# Altium PCB IOT_CPU_v0.PcbDoc (part 2 of 2)
Units mil, origin at the board's own origin, x right, y up, seen from the top; angles counter-clockwise.
Board outline 3866.14 x 1661.42 mil, 4 copper layers (Top Layer, Top, Bottom Layer, Bottom, Mid-Layer 2, GND, Mid-Layer 1, +3.3V); 132 components, 138 nets, 669 pads, 214 vias.
Unrouted connection lines stored in the file: 63.
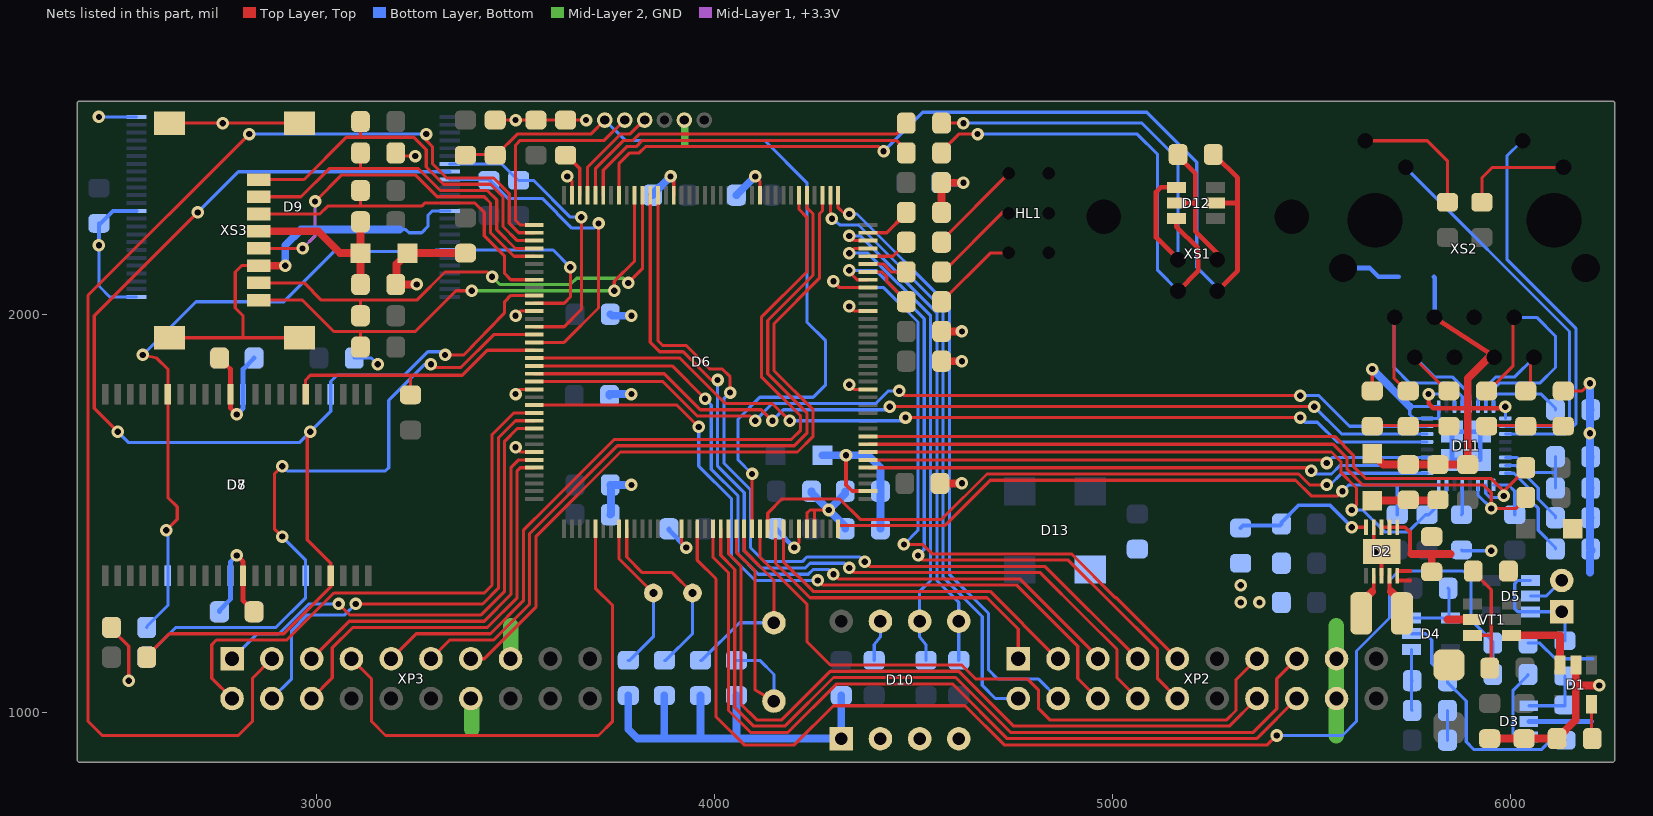
[diagram p4: the nets of this part, all layers, seen from the top]

## Via types
v1: diameter 31.5, hole 15.75, Top Layer, Top to Bottom Layer, Bottom, 214 vias

## Nets (pads, with @x,y where several pads share a name; then routed paths per layer and width w, separated by ;. In a path a pad name is that pad's centre, name@x,y a point inside that pad or via, vN(x,y) a via of type N, cw(c..) or ccw(c..) an arc to the next point about the centre after c; other vN are vias at no path point) (continued)
ETH-CRSDV: D6.43 D11.15 R31.1 | length 1669.2
  Top Layer, Top w7.87: D6.43@4385.83,1653.54 5551.18,1653.54 5574.8,1629.92 5574.8,1602.36 5614.17,1562.99 5614.17,1519.68 v1(5602.36,1507.87)
  Bottom Layer, Bottom w7.87: v1(5602.36,1507.87) 5629.92,1507.87 5685.04,1452.76 5744.09,1452.76 5787.4,1496.06 R31.1@5791.34,1496.06 5795.28,1496.06 5840.55,1541.34 D11.15@5840.55,1570.87
ETH-MDC: D6.27 D11.17 | length 1803.7
  Top Layer, Top w7.87: D6.27@4133.86,1460.63 4133.86,1500 4169.29,1535.43 4314.96,1535.43 4366.14,1484.25 4570.87,1484.25 4685.04,1598.43 5468.5,1598.43 5496.06,1570.87 v1(5539.37,1570.87)
  Bottom Layer, Bottom w7.87: v1(5539.37,1570.87) 5547.24,1570.87 5576.77,1600.39 D11.17@5791.34,1600.39
ETH-MDIO: D6.36 D11.16 R25.1 | length 1667.5
  Top Layer, Top w7.87: D6.36@4311.02,1460.63 4311.02,1468.5 4578.74,1468.5 4692.91,1582.68 5460.63,1582.68 5500,1543.31 5566.93,1543.31 v1(5578.74,1555.12)
  Bottom Layer, Bottom w7.87: v1(5578.74,1555.12) 5594.49,1570.87 5716.54,1570.87 ; R25.1@5716.54,1496.06 5716.54,1570.87 ; D11.16@5820.87,1570.87 5716.54,1570.87
ETH-RX0: D6.44 D11.11 R27.1 | length 1846.2
  Top Layer, Top w7.87: D6.44@4385.83,1673.23 5555.12,1673.23 5590.55,1637.8 5590.55,1610.24 5629.92,1570.87 5933.07,1570.87 5952.76,1551.18 v1(5952.76,1511.81) 6015.75,1511.81 6039.37,1535.43 R27.1@6039.37,1539.37
  Bottom Layer, Bottom w7.87: D11.11@5919.29,1570.87 5919.29,1545.28 v1(5952.76,1511.81)
ETH-RX1: D6.45 D11.10 R29.1 | length 1838
  Top Layer, Top w7.87: D6.45@4385.83,1692.91 5559.06,1692.91 5606.3,1645.67 5606.3,1618.11 5637.8,1586.61 5952.76,1586.61 v1@5984.25,1555.12 ; v1(5984.25,1543.31) v1@5984.25,1555.12 ; R29.1@6039.37,1614.17 6039.37,1610.24 v1@5984.25,1555.12
  Bottom Layer, Bottom w7.87: D11.10@5938.98,1570.87 5938.98,1549.21 5948.82,1539.37 5980.31,1539.37 v1(5984.25,1543.31)
ETH-TX0: D6.128 D11.22 | length 2336.2
  Top Layer, Top w7.87: D6.128@3547.24,1850.39 3874.02,1850.39 3964.57,1759.84 4118.11,1759.84 v1(4145.67,1732.28) ; v1(4440.94,1767.72) v1(5507.87,1767.72)
  Bottom Layer, Bottom w7.87: v1(4145.67,1732.28) 4173.23,1759.84 4433.07,1759.84 v1(4440.94,1767.72) ; v1(5507.87,1767.72) 5576.77,1698.82 D11.22@5791.34,1698.82
ETH-TX1: D6.129 D11.23 | length 2352.5
  Top Layer, Top w7.87: D6.129@3547.24,1830.71 3870.08,1830.71 3956.69,1744.09 4090.55,1744.09 v1(4102.36,1732.28) ; v1(4464.57,1807.09) 4476.38,1795.28 v1(5472.44,1795.28)
  Bottom Layer, Bottom w7.87: v1(4102.36,1732.28) 4145.67,1775.59 4405.51,1775.59 4437.01,1807.09 v1(4464.57,1807.09) ; v1(5472.44,1795.28) 5519.69,1795.28 5596.46,1718.5 D11.23@5791.34,1718.5
ETH-TXEN: D6.126 D11.21 | length 2337.9
  Top Layer, Top w7.87: D6.126@3547.24,1889.76 3913.39,1889.76 4027.56,1775.59 4145.67,1775.59 v1(4188.98,1732.28) ; v1(4480.31,1740.16) v1(5472.44,1740.16)
  Bottom Layer, Bottom w7.87: v1(4188.98,1732.28) 4472.44,1732.28 v1(4480.31,1740.16) ; v1(5472.44,1740.16) 5484.25,1728.35 5515.75,1728.35 5564.96,1679.13 D11.21@5791.34,1679.13
ETH_RST: D6.42 D11.19 | length 1414.5
  Top Layer, Top w7.87: D6.42@4385.83,1633.86 5531.5,1633.86 v1(5539.37,1625.98)
  Bottom Layer, Bottom w7.87: v1(5539.37,1625.98) 5553.15,1639.76 D11.19@5791.34,1639.76
ETH_~INT: D6.41 D11.18 | length 1421
  Top Layer, Top w7.87: D6.41@4385.83,1614.17 5492.13,1614.17 v1(5500,1606.3)
  Bottom Layer, Bottom w7.87: v1(5500,1606.3) 5507.87,1598.43 5551.18,1598.43 5572.83,1620.08 D11.18@5791.34,1620.08
GND: C1.1 C2.1 C3.1 C4.1 C5.2 C6.1 C7.1 C8.1 C9.2 C10.1 C11.1 C12.2 C13.2 C14.1 C15.1 C16.2 C17.2 C18.2 C19.2 C20.2 C21.1 C22.1 C23.1 C24.1 C25.1 C26.1 C27.2 C28.1 C29.2 C30.1 C31.2 C32.1 C33.1 C34.1 C35.1 C36.1 C37.1 C38.2 C39.1 C40.2 C41.2 C43.2 C44.2 C45.2 C47.2 C48.2 C49.1 C50.2 C52.1 C53.1 D1.2 D2.3 D2.9 D2.11 D3.2 D4.2 D5.2 D6.16 D6.31 D6.38 D6.51 D6.61 D6.83 D6.94 D6.107 D6.120 D6.130 D6.138 D7.12 D7.34 D8.12 D8.34 D9.13 D9.25 D9.36 D9.48 D10.1 D10.2 D10.3 D10.4 D10.7 D11.24 D11.25 D11.33 D11.34 D11.35 D11.36 D12.2 D13.2 HL1.2 HL1.4 HL1.6 R1.1 R2.1 R5.1 R8.1 R10.1 R28.2 R30.2 R32.2 R39.2 R44.2 R55.1 R56.1 X5.1 XP1.2 XP2.17 XP2.18 XP3.14 XP3.15 XS1.4 XS2.15 XS2.16 XS3.6 XS3.9 XS3.10 XS3.11 XS3.12 | length 10524.4
  Top Layer, Top w7.87: R55.1@2484.25,1212.6 2484.25,1208.66 2527.56,1165.35 v1(2527.56,1078.74) ; XS3.12@2629.92,1940.94 2814.96,1940.94 ; XS3.11@2629.92,2480.32 v1(2763.78,2480.32) XS3.10@2956.69,2480.32 ; XS3.6@2854.33,2122.05 2811.02,2122.05 2795.28,2106.3 2795.28,2015.75 2814.96,1996.06 2814.96,1940.94 ; XS3.9@2956.69,1940.94 2814.96,1940.94 ; R44.2@3198.82,2405.51 3206.69,2397.64 v1(3248.03,2397.64) ; C8.1@3448.82,2488.19 v1(3500,2488.19) C28.1@3551.18,2488.19 C21.1@3625.98,2488.19 v1(3677.17,2488.19) ; v1(3500,1665.35) 3511.81,1653.54 D6.138@3547.24,1653.54 ; v1(3500,1799.21) 3511.81,1811.02 D6.130@3547.24,1811.02 ; v1(3500,1996.06) 3511.81,2007.87 D6.120@3547.24,2007.87 ; v1(3629.92,2346.46) 3641.73,2334.65 D6.107@3641.73,2299.21 ; v1(3889.76,2346.46) 3897.64,2338.58 D6.94@3897.64,2299.21 ; D6.16@3917.32,1460.63 3917.32,1425.2 v1(3929.13,1413.39) ; v1(4102.36,2346.46) 4114.17,2334.65 D6.83@4114.17,2299.21 ; v1(4200.79,1413.39) 4212.6,1425.2 D6.31@4212.6,1460.63 ; v1(4338.58,1822.83) 4350.39,1811.02 D6.51@4385.83,1811.02 ; v1(4338.58,2019.68) 4350.39,2007.87 D6.61@4385.83,2007.87 ; C53.1@5653.54,1807.09 v1(5653.54,1862.2) ; C52.1@6133.86,1807.09 6181.1,1807.09 v1(6200.79,1826.77)
  Top Layer, Top w9.84: v1(4330.71,1645.67) 4330.71,1570.87 4346.46,1555.12 D6.38@4385.83,1555.12 ; D2.9@5657.48,1464.57 5657.48,1405.51 v1(5661.42,1401.57) ; D2.3@5677.17,1342.52 5677.17,1385.83 5668.31,1394.68 v1(5661.42,1401.57) ; D2.11@5677.17,1403.54 5663.39,1403.54 v1(5661.42,1401.57)
  Top Layer, Top w11.81: C33.1@2755.91,1889.76 2783.46,1862.2 D7.12@2783.46,1799.21 2783.46,1763.78 v1(2799.21,1748.03) ; v1(2799.21,1393.7) 2814.96,1377.95 2814.96,1279.53 C32.1@2842.52,1251.97 ; D12.2@5161.42,2279.53 5208.66,2279.53 ; C39.1@5165.35,2401.57 5165.35,2397.64 5208.66,2354.33 5208.66,2279.53 ; XS1.4@5263.78,2137.01 5263.78,2153.54 5208.66,2208.66 5208.66,2279.53
  Top Layer, Top w19.68: XS3.6@2854.33,2122.05 v1(2921.26,2122.05) ; v1(3251.97,2074.8) C47.2@3198.82,2074.8 3200.79,2076.77 3200.79,2125.98 C48.2@3228.35,2153.54 C36.1@3374.02,2153.54 ; C22.1@4566.93,1574.8 v1(4622.05,1574.8) ; C23.1@4570.87,1881.89 v1(4622.05,1881.89) ; C24.1@4570.87,1956.69 v1(4622.05,1956.69) ; C14.1@4570.87,2255.91 C25.1@4570.87,2330.71 v1(4625.98,2330.71) ; C40.2@5649.61,1535.43 C40.2@5653.54,1531.5 5742.13,1531.5 C41.2@5744.09,1533.46 5746.06,1531.5 5816.93,1531.5 C43.2@5818.9,1533.46 ; R1.1@5948.82,933.07 C1.1@6035.43,933.07 R2.1@6118.11,933.07 6165.35,980.32 6165.35,1066.93 ; D1.2@6165.35,1118.11 6165.35,1066.93 ; v1(6224.41,1066.93) 6165.35,1066.93
  Mid-Layer 2, GND w19.68: X5.1@3924.41,2488.19 3925.2,2487.4 3925.2,2429.13
  Mid-Layer 2, GND w39.37: XP3.14@3387.4,1033.86 3389.76,1031.5 3389.76,956.69 ; XP3.15@3487.4,1133.86 3488.19,1134.65 3488.19,1216.54 ; 5562.99,940.94 XP2.18@5562.99,1034.65 ; 5562.99,1216.54 5562.99,1134.65 XP2.17@5563.78,1133.86 5562.99,1133.07 XP2.18@5562.99,1034.65 ; XP2.18@5563.78,1033.86 XP2.18@5562.99,1034.65
  Bottom Layer, Bottom w7.87: v1(2452.76,2173.23) 2452.76,2070.87 2480.32,2043.31 D9.25@2547.24,2043.31 ; v1(2452.76,2496.06) D9.48@2547.24,2496.06 ; R56.1@3094.49,1889.76 3137.8,1889.76 v1(3153.54,1874.02) ; 3208.66,2212.6 3224.41,2212.6 3232.28,2204.72 3263.78,2204.72 3279.53,2220.47 3279.53,2248.03 3291.34,2259.84 D9.13@3334.65,2259.84 ; C6.1@4401.57,1129.92 4401.57,1169.29 4417.32,1188.98 D10.7@4417.32,1228.35 ; D4.2@5751.97,1196.85 5787.4,1196.85 5803.15,1181.1 5803.15,1122.05 5842.52,1082.68 R8.1@5842.52,1078.74 5842.52,1074.8 5889.76,1027.56 5889.76,925.2 5909.45,905.51 6078.74,905.51 6102.36,929.13 R5.1@6137.8,929.13 ; D11.33@5854.33,1704.72 5820.87,1738.19 ; R32.2@5877.95,1407.48 5879.92,1405.51 v1(5952.76,1405.51) ; C5.2@6045.28,1173.23 6074.8,1173.23 6114.17,1133.86 6208.66,1133.86 ; D5.2@6051.18,1291.34 6090.55,1291.34 XP1.2@6129.92,1330.71 ; 5820.87,1738.19 5757.87,1738.19 5748.03,1748.03 5748.03,1767.72 D11.25@5820.87,1767.72 5820.87,1738.19
  Bottom Layer, Bottom w9.84: v1(2452.76,2173.23) C37.1@2452.76,2228.35 2456.69,2228.35 2488.19,2259.84 D9.36@2547.24,2259.84
  Bottom Layer, Bottom w11.81: C35.1@2755.91,1251.97 2755.91,1255.91 2783.46,1283.46 D8.12@2783.46,1342.52 2783.46,1377.95 v1(2799.21,1393.7) ; v1(2799.21,1748.03) 2814.96,1763.78 2814.96,1862.2 C34.1@2842.52,1889.76 ; C15.1@3885.83,1460.63 3885.83,1456.69 v1(3929.13,1413.39) ; C16.2@4155.51,1460.63 4157.48,1458.66 4157.48,1456.69 v1(4200.79,1413.39) ; XS2.15@5580.24,2116.22 5647.56,2116.22 5669.29,2094.49 5720.47,2094.49 ; D3.2@6047.24,976.38 6204.72,976.38 ; D11.34@5854.33,1633.86 D11.33@5854.33,1704.72 D11.35@5925.2,1704.72 D11.36@5925.2,1633.86 D11.34@5854.33,1633.86
  Bottom Layer, Bottom w19.68: v1(2921.26,2122.05) 2921.26,2173.23 2960.63,2212.6 3208.66,2212.6 ; C30.1@3736.22,1795.28 3736.22,1799.21 v1(3791.34,1799.21) ; C12.2@3738.19,1496.06 3740.16,1498.03 3740.16,1568.9 C31.2@3738.19,1570.87 v1(3791.34,1570.87) ; C29.2@3738.19,2000 3744.09,1996.06 v1(3791.34,1996.06) ; C17.2@3783.46,1041.34 3783.46,956.69 3807.09,933.07 3874.02,933.07 ; C27.2@3844.49,2299.21 3844.49,2301.18 v1(3889.76,2346.46) ; C18.2@3874.02,1041.34 3874.02,933.07 ; C20.2@3964.57,1041.34 3964.57,933.07 ; C19.2@4055.12,1041.34 4055.12,933.07 ; C26.1@4055.12,2299.21 v1(4102.36,2346.46) ; C9.2@4271.65,1645.67 v1(4330.71,1645.67) 4385.83,1645.67 4417.32,1614.17 C10.1@4417.32,1555.12 C11.1@4417.32,1460.63 ; C38.2@4318.9,1041.34 D10.1@4318.9,933.07 4055.12,933.07 ; C13.2@4568.9,2330.71 v1(4625.98,2330.71) ; v1(5653.54,1862.2) 5748.03,1767.72 ; 6200.79,1350.39 6200.79,1401.57 6204.72,1405.51 6204.72,1407.48 R28.2@6202.76,1409.45 6200.79,1411.42 6200.79,1486.22 R30.2@6202.76,1488.19 6200.79,1490.16 6200.79,1561.02 C44.2@6202.76,1562.99 6200.79,1564.96 6200.79,1635.83 C45.2@6202.76,1641.73 6200.79,1637.8 v1(6200.79,1700.79) 6200.79,1757.87 R39.2@6202.76,1759.84 6200.79,1761.81 v1(6200.79,1826.77) ; 3874.02,933.07 3964.57,933.07 ; 3964.57,933.07 4055.12,933.07
  other v1: 5322.83,1275.59 5370.08,1275.59 5322.83,1318.9
NCE3: D6.124 D9.9 R19.2 | length 839
  Top Layer, Top w7.87: D6.124@3547.24,1929.13 3622.05,1929.13 3708.66,2015.75 v1(3708.66,2228.35)
  Bottom Layer, Bottom w7.87: D9.9@3334.65,2338.58 3429.13,2338.58 R19.2@3433.07,2336.61 3435.04,2336.61 3480.32,2291.34 3566.93,2291.34 3641.73,2216.54 3696.85,2216.54 v1(3708.66,2228.35)
NE1: D6.123 D8.6 R16.2 | length 1720.2
  Top Layer, Top w7.87: v1(2913.39,1440.94) 2893.7,1460.63 2893.7,1598.43 v1(2913.39,1618.11) ; v1(3287.4,1874.02) 3295.28,1866.14 3362.2,1866.14 3444.88,1948.82 D6.123@3547.24,1948.82
  Bottom Layer, Bottom w7.87: R16.2@2572.83,1137.8 2574.8,1141.73 2645.67,1212.6 2897.64,1212.6 2972.44,1287.4 2972.44,1381.89 v1(2913.39,1440.94) ; v1(2913.39,1618.11) 2925.2,1606.3 3173.23,1606.3 3181.1,1614.17 3181.1,1783.46 3271.65,1874.02 v1(3287.4,1874.02)
NE3: D6.125 D7.6 R21.2 | length 690.4
  Top Layer, Top w7.87: D7.6@2972.44,1799.21 2972.44,1834.65 2984.25,1846.46 3236.22,1846.46 ; R21.2@3236.22,1797.24 3236.22,1846.46 ; D6.125@3547.24,1909.45 3429.13,1909.45 3366.14,1846.46 3236.22,1846.46
NET00000: C2.2 R3.1 VT1.3 | length 311.7
  Top Layer, Top w7.87: VT1.3@5905.51,1192.91 5952.76,1192.91 ; C2.2@5907.48,1354.33 5909.45,1352.36 5909.45,1350.39 5952.76,1307.09 5952.76,1192.91 ; R3.1@5948.82,1110.24 5948.82,1114.17 5952.76,1118.11 5952.76,1192.91
NET00001: C3.2 D2.5 D2.6 D2.7 D2.8 VD1.K VT1.2 | length 424.2
  Top Layer, Top w9.84: D2.8@5677.17,1464.57 D2.7@5696.85,1464.57 D2.6@5716.54,1464.57 5736.22,1464.57 5748.03,1452.76 5748.03,1397.64 ; 5748.03,1330.71 5716.54,1330.71 5716.54,1354.33 5748.03,1354.33
  Top Layer, Top w19.68: 5751.97,1397.64 5803.15,1397.64 ; C3.2@5803.15,1352.36 5803.15,1397.64 ; 5842.52,1232.28 VT1.2@5905.51,1232.28 ; 5850.39,1397.64 5803.15,1397.64
NET00002: D1.3 D5.1 D5.3 R4.2 VT1.4 XP1.1 | length 499.9
  Top Layer, Top w19.68: VT1.4@6003.94,1192.91 6125.98,1192.91 D1.3@6125.98,1118.11
  Bottom Layer, Bottom w7.87: D5.1@6051.18,1330.71 6019.69,1330.71 6011.81,1322.83 6011.81,1259.84 6019.69,1251.97 D5.3@6051.18,1251.97 XP1.1@6129.92,1251.97 6137.8,1244.09 R4.2@6137.8,1179.13
NET00003: D3.1 R4.1 R5.2 | length 165.4
  Bottom Layer, Bottom w7.87: D3.1@6047.24,1015.75 6137.8,1015.75 R4.1@6137.8,1090.55
NET00004: D3.3 D3.4 R11.2 | length 271
  Bottom Layer, Bottom w7.87: D3.4@5948.82,937.01 6007.87,937.01 ; R11.2@6045.28,1094.49 6043.31,1090.55 6007.87,1055.12 6007.87,937.01 ; D3.3@6047.24,937.01 6007.87,937.01
NET00005: HL1.1 R51.1 | length 243.4
  Top Layer, Top w7.87: R51.1@4570.87,2181.1 4570.87,2185.04 HL1.1@4740.16,2354.33
NET00006: D1.5 R2.2 | length 87.1
  Top Layer, Top w7.87: D1.5@6204.72,1019.68 6204.72,937.01 R2.2@6206.69,933.07
NET00007: HL1.3 R52.1 | length 231.6
  Top Layer, Top w7.87: R52.1@4570.87,2106.3 4574.8,2106.3 4724.41,2255.91 4736.22,2255.91 HL1.3@4740.16,2254.33
NET00008: HL1.5 R53.1 | length 220.6
  Top Layer, Top w7.87: R53.1@4570.87,2031.5 4692.91,2153.54 4740.16,2153.54 HL1.5@4740.16,2154.33
NET00009: D2.4 L1.1 | length 111.5
  Top Layer, Top w9.84: D2.4@5696.85,1342.52 5696.85,1307.09 5700.79,1303.15
  Top Layer, Top w19.68: 5700.79,1303.15 5728.35,1275.59 L1.1@5728.35,1248.03 L1.1@5728.35,1244.09
NET00010: D2.2 L1.2 | length 107.5
  Top Layer, Top w9.84: 5653.54,1303.15 5657.48,1307.09 D2.2@5657.48,1342.52
  Top Layer, Top w19.68: L1.2@5625.98,1248.03 5625.98,1275.59 5653.54,1303.15
NET00012: D6.68 R51.2 | length 111.9
  Top Layer, Top w7.87: D6.68@4385.83,2145.67 4448.82,2145.67 4480.31,2177.17 R51.2@4482.28,2181.1
NET00013: D2.10 R9.1 R10.2 | length 363.7
  Top Layer, Top w9.84: v1(5602.36,1464.57) D2.10@5637.8,1464.57
  Bottom Layer, Bottom w9.84: R10.2@5322.83,1462.6 5328.74,1468.5 5421.26,1468.5 R9.1@5425.2,1472.44 5425.2,1476.38 5468.5,1519.68 5547.24,1519.68 v1(5602.36,1464.57)
NET00014: BQ1.2 C17.1 D6.8 | length 395
  Top Layer, Top w7.87: D6.8@3759.84,1460.63 3759.84,1385.83 BQ1.2@3846.46,1299.21
  Bottom Layer, Bottom w7.87: C17.1@3783.46,1129.92 3787.4,1129.92 3846.46,1188.98 BQ1.2@3846.46,1299.21
NET00015: BQ1.1 C18.1 D6.9 | length 474.7
  Top Layer, Top w7.87: D6.9@3779.53,1460.63 3779.53,1389.76 3818.9,1350.39 3893.7,1350.39 BQ1.1@3944.88,1299.21
  Bottom Layer, Bottom w7.87: C18.1@3874.02,1129.92 3877.95,1129.92 3944.88,1196.85 BQ1.1@3944.88,1299.21
NET00016: BQ2.2 C19.1 D6.23 | length 655.9
  Top Layer, Top w7.87: D6.23@4055.12,1460.63 4055.12,1401.57 4102.36,1354.33 4102.36,1055.12 BQ2.2@4149.61,1027.56
  Bottom Layer, Bottom w7.87: C19.1@4055.12,1129.92 4114.17,1129.92 4149.61,1094.49 BQ2.2@4149.61,1027.56
NET00017: BQ2.1 C20.1 D6.24 | length 491.4
  Top Layer, Top w7.87: D6.24@4074.8,1460.63 4074.8,1405.51 4149.61,1330.71 BQ2.1@4149.61,1224.41
  Bottom Layer, Bottom w7.87: C20.1@3964.57,1129.92 3968.5,1129.92 4062.99,1224.41 BQ2.1@4149.61,1224.41
NET00018: C44.1 C45.1 D11.6 | length 220.2
  Bottom Layer, Bottom w7.87: D11.6@5988.19,1639.76 6017.72,1639.76 6055.12,1602.36 6114.17,1602.36 ; C44.1@6114.17,1562.99 6114.17,1602.36 ; C45.1@6114.17,1641.73 6114.17,1602.36
NET00019: C21.2 D6.106 | length 115.9
  Top Layer, Top w9.84: C21.2@3625.98,2399.61 3629.92,2397.64 3661.42,2366.14 D6.106@3661.42,2299.21
NET00020: C14.2 D6.71 | length 118.5
  Top Layer, Top w9.84: D6.71@4385.83,2204.72 4433.07,2204.72 4480.31,2251.97 C14.2@4482.28,2255.91
NET00021: D6.67 R52.2 | length 104.6
  Top Layer, Top w7.87: D6.67@4385.83,2125.98 4425.2,2125.98 4444.88,2106.3 R52.2@4482.28,2106.3
NET00023: C10.2 C11.2 D6.32 D6.33 R14.1 | length 338.9
  Top Layer, Top w7.87: D6.32@4232.28,1460.63 4232.28,1500 4240.16,1507.87 4251.97,1507.87 ; D6.33@4251.97,1460.63 4251.97,1507.87 ; v1(4287.4,1507.87) 4251.97,1507.87
  Bottom Layer, Bottom w19.68: R14.1@4244.09,1555.12 4244.09,1551.18 v1(4287.4,1507.87) ; C11.2@4328.74,1460.63 4328.74,1466.54 v1(4287.4,1507.87) ; C10.2@4328.74,1555.12 4328.74,1549.21 v1(4287.4,1507.87)
NET00024: D6.66 R53.2 | length 135.2
  Top Layer, Top w7.87: D6.66@4385.83,2106.3 4421.26,2106.3 4433.07,2094.49 4433.07,2082.68 4480.31,2035.43 R53.2@4482.28,2031.5
NET00028: 
NET00029: R6.1 R7.1 | length 74.8
  Bottom Layer, Bottom w7.87: R6.1@5842.52,929.13 R7.1@5842.52,1003.94
NET00030: C40.1 C41.1 C43.1 D11.1 D11.27 L3.1 XS2.3 XS2.6 | length 1184.7
  Top Layer, Top w11.81: v1(5795.28,1799.21) 5795.28,1775.59 5807.09,1763.78 5893.7,1763.78 5984.25,1763.78 v1(5988.19,1767.72) ; XS2.3@5810.24,1992.13 5960.63,1893.7
  Top Layer, Top w19.68: C40.1@5653.54,1649.61 5681.1,1622.05 C41.1@5744.09,1622.05 C43.1@5818.9,1622.05 L3.1@5893.7,1622.05 5893.7,1763.78 5893.7,1838.58 5947.24,1892.13 XS2.6@5960.24,1892.13 5960.24,1893.31 5960.63,1893.7
  Bottom Layer, Bottom w7.87: v1(5795.28,1799.21) 5850.39,1799.21 5860.24,1789.37 D11.27@5860.24,1767.72 ; D11.1@5988.19,1738.19 v1(5988.19,1767.72)
  Bottom Layer, Bottom w11.81: 5809.06,2094.49 5811.02,2090.55 5811.02,1992.91 XS2.3@5810.24,1992.13
NET00031: D4.1 R7.2 R8.2 | length 156
  Bottom Layer, Bottom w7.87: D4.1@5751.97,1157.48 5751.97,1080.71 R8.2@5753.94,1078.74 5751.97,1076.77 5751.97,1005.91 R7.2@5753.94,1003.94
NET00032: D4.3 D4.4 R12.2 | length 174
  Bottom Layer, Bottom w7.87: D4.3@5751.97,1236.22 D4.4@5846.46,1236.22 ; R12.2@5844.49,1311.02 5846.46,1309.06 D4.4@5846.46,1236.22 ; D4.4@5850.39,1236.22 D4.4@5846.46,1236.22
NET00038: C52.2 R35.2 R36.2 | length 196.2
  Top Layer, Top w7.87: R36.2@5940.94,1718.5 5942.91,1720.47 6037.4,1720.47 R35.2@6039.37,1718.5 6041.34,1720.47 6131.89,1720.47 C52.2@6133.86,1718.5
NET00039: C53.2 R37.2 R38.2 | length 196.2
  Top Layer, Top w7.87: C53.2@5653.54,1718.5 5655.51,1720.47 5742.13,1720.47 R37.2@5744.09,1718.5 5746.06,1720.47 5844.49,1720.47 R38.2@5846.46,1718.5
NET00041: D11.13 R32.1 | length 75.6
  Bottom Layer, Bottom w7.87: R32.1@5877.95,1496.06 5879.92,1498.03 D11.13@5879.92,1570.87
NET00042: D11.7 R30.1 | length 199.1
  Bottom Layer, Bottom w7.87: D11.7@5988.19,1620.08 6013.78,1620.08 6070.87,1562.99 6070.87,1535.43 6114.17,1492.13 R30.1@6114.17,1488.19
NET00043: D11.8 R28.1 | length 255.8
  Bottom Layer, Bottom w7.87: D11.8@5988.19,1600.39 6009.84,1600.39 6055.12,1555.12 6055.12,1527.56 6070.87,1511.81 6070.87,1456.69 6114.17,1413.39 R28.1@6114.17,1409.45
NET00049: D11.9 R26.1 | length 118.7
  Bottom Layer, Bottom w7.87: D11.9@5958.66,1570.87 5996.06,1570.87 6011.81,1555.12 R26.1@6011.81,1496.06
NET00053: D11.2 XS2.10 | length 974.5
  Bottom Layer, Bottom w7.87: XS2.10@5738.19,2369.29 5740.16,2367.32 5740.16,2366.14 6149.61,1956.69 6149.61,1732.28 6135.83,1718.5 D11.2@5988.19,1718.5
NET00054: D11.3 XS2.11 | length 988.5
  Bottom Layer, Bottom w7.87: D11.3@5988.19,1698.82 6139.76,1698.82 6165.35,1724.41 6165.35,1964.57 5992.13,2137.8 5992.13,2397.64 6027.56,2433.07 XS2.11@6032.28,2436.22
NET00056: R48.2 XS2.12 | length 277.2
  Top Layer, Top w7.87: R48.2@5929.13,2281.5 5929.13,2342.52 5955.83,2369.22 XS2.12@6134.24,2369.22
NET00058: D11.32 R39.1 | length 199.9
  Bottom Layer, Bottom w7.87: D11.32@5958.66,1767.72 5958.66,1789.37 5968.5,1799.21 6078.74,1799.21 6114.17,1763.78 R39.1@6114.17,1759.84
NET00061: C47.1 C48.1 L2.1 XS3.4 | length 436.2
  Top Layer, Top w19.68: XS3.4@2854.33,2208.66 3003.94,2208.66 3059.06,2153.54 C48.1@3110.24,2153.54 ; C47.1@3110.24,2074.8 C48.1@3110.24,2153.54 ; L2.1@3110.24,2232.28 C48.1@3110.24,2153.54
NET00070: D12.3 R33.1 XS1.2 | length 1176.8
  Top Layer, Top w7.87: R33.1@4570.87,2405.51 4570.87,2409.45 4614.17,2452.76 v1(4661.42,2452.76)
  Top Layer, Top w11.81: D12.3@5161.42,2240.16 5161.42,2220.47 5216.54,2165.35 5216.54,2109.45 XS1.2@5165.35,2058.27
  Bottom Layer, Bottom w7.87: v1(4661.42,2452.76) 5062.99,2452.76 5114.17,2401.57 5114.17,2110.24 5165.35,2059.06 XS1.2@5165.35,2058.27
NET00071: D12.1 R34.1 XS1.3 | length 1133.7
  Top Layer, Top w7.87: R34.1@4570.87,2480.32 v1(4625.98,2480.32)
  Top Layer, Top w11.81: D12.1@5161.42,2318.9 5122.05,2318.9 5110.24,2307.09 5110.24,2192.91 5165.35,2137.8 XS1.3@5165.35,2137.01
  Bottom Layer, Bottom w7.87: v1(4625.98,2480.32) 5074.8,2480.32 5165.35,2389.76 XS1.3@5165.35,2137.01
NET00088: R47.2 XS2.9 | length 331.5
  Top Layer, Top w7.87: XS2.9@5636.24,2436.22 5792.13,2436.22 5842.52,2385.83 R47.2@5842.52,2281.5
PC0: D6.26 XP2.13 | length 1681.9
  Top Layer, Top w7.87: D6.26@4114.17,1460.63 4114.17,1389.76 4232.28,1271.65 4232.28,1177.17 4291.34,1118.11 4622.05,1118.11 4657.48,1082.68 4787.4,1082.68 4814.96,1055.12 4814.96,1007.87 4842.52,980.32 5287.4,980.32 5311.02,1003.94 5311.02,1081.1 XP2.13@5363.78,1133.86
PE11: D6.64 XP2.9 | length 1728.3
  Top Layer, Top w7.87: v1(4299.21,2082.68) 4314.96,2066.93 D6.64@4385.83,2066.93 ; v1(4476.38,1421.26) 4523.62,1421.26 4547.24,1397.64 4897.64,1397.64 5007.87,1287.4 5010.24,1287.4 XP2.9@5163.78,1133.86
  Bottom Layer, Bottom w7.87: v1(4299.21,2082.68) 4314.96,2066.93 4425.2,2066.93 4511.81,1980.32 4511.81,1456.69 v1(4476.38,1421.26)
PE12: D6.65 XP2.10 | length 1744.3
  Top Layer, Top w7.87: v1(4338.58,2110.24) 4338.58,2106.3 4358.27,2086.61 D6.65@4385.83,2086.61 ; v1(4511.81,1393.7) 4523.62,1381.89 4889.76,1381.89 5000,1271.65 5114.17,1157.48 5114.17,1083.46 XP2.10@5163.78,1033.86
  Bottom Layer, Bottom w7.87: v1(4338.58,2110.24) 4405.51,2110.24 4527.56,1988.19 4527.56,1409.45 v1(4511.81,1393.7)
PF10: D6.22 XP2.14 | length 1903.5
  Top Layer, Top w7.87: D6.22@4035.43,1460.63 4035.43,1397.64 4066.93,1366.14 4066.93,1019.68 4106.3,980.32 4169.29,980.32 4291.34,1102.36 4614.17,1102.36 4751.97,964.57 5294.49,964.57 XP2.14@5363.78,1033.86
RD+: D11.31 R36.1 XS2.7 | length 649.2
  Top Layer, Top w7.87: R36.1@5940.94,1807.09 5944.88,1807.09 6007.87,1870.08 6007.87,1989.76 XS2.7@6010.24,1992.13
  Bottom Layer, Bottom w7.87: D11.31@5938.98,1767.72 5938.98,1793.31 5972.44,1826.77 6074.8,1826.77 6114.17,1866.14 6114.17,1944.88 6066.93,1992.13 XS2.7@6010.24,1992.13
RD-: D11.30 R35.1 XS2.8 | length 304.1
  Top Layer, Top w7.87: R35.1@6039.37,1807.09 6051.18,1818.9 6051.18,1883.07 XS2.8@6060.24,1892.13
  Bottom Layer, Bottom w7.87: D11.30@5919.29,1767.72 5919.29,1797.24 5964.57,1842.52 6011.81,1842.52 6059.06,1889.76 6059.06,1890.94 XS2.8@6060.24,1892.13
SCL1: D6.139 XP3.5 | length 953.8
  Top Layer, Top w7.87: XP3.5@2987.4,1133.86 3081.89,1228.35 3421.26,1228.35 3488.19,1295.28 3488.19,1614.17 3507.87,1633.86 D6.139@3547.24,1633.86
SCL2: D6.69 D10.6 R24.1 | length 1205.2
  Top Layer, Top w7.87: v1(4338.58,2153.54) 4350.39,2165.35 D6.69@4385.83,2165.35
  Bottom Layer, Bottom w7.87: v1(4338.58,2153.54) 4385.83,2153.54 4543.31,1996.06 4543.31,1330.71 4515.75,1303.15 D10.6@4515.75,1228.35 4515.75,1188.98 4531.5,1169.29 R24.1@4531.5,1129.92
SDA1: D6.140 XP3.6 | length 1031.3
  Top Layer, Top w7.87: XP3.6@2987.4,1033.86 3039.37,1085.83 3039.37,1161.42 3090.55,1212.6 3429.13,1212.6 3503.94,1287.4 3503.94,1606.3 3511.81,1614.17 D6.140@3547.24,1614.17
SDA2: D6.70 D10.5 R23.1 | length 1249.4
  Top Layer, Top w7.87: v1(4338.58,2196.85) 4350.39,2185.04 D6.70@4385.83,2185.04
  Bottom Layer, Bottom w7.87: v1(4338.58,2196.85) 4366.14,2196.85 4559.06,2003.94 4559.06,1330.71 4614.17,1275.59 D10.5@4614.17,1228.35 R23.1@4614.17,1129.92
SDIO_CK: D6.113 XS3.5 | length 948.9
  Top Layer, Top w7.87: XS3.5@2854.33,2165.35 v1(2964.57,2165.35) ; v1(2996.06,2283.46) 3062.99,2350.39 3248.03,2350.39 3303.15,2295.28 3421.26,2295.28 3437.01,2279.53 3437.01,2204.72 3496.06,2145.67 D6.113@3547.24,2145.67
  Mid-Layer 1, +3.3V w7.87: v1(2964.57,2165.35) 2996.06,2196.85 v1(2996.06,2283.46)
SDIO_CMD: D6.116 R40.1 XS3.3 | length 883.6
  Top Layer, Top w7.87: XS3.3@2854.33,2251.97 3007.87,2251.97 3027.56,2271.65 3110.24,2271.65 ; R40.1@3110.24,2311.02 3110.24,2271.65 ; D6.116@3547.24,2086.61 3488.19,2086.61 3472.44,2102.36 3472.44,2145.67 3421.26,2196.85 3421.26,2255.91 3397.64,2279.53 3271.65,2279.53 3263.78,2271.65 3110.24,2271.65
SDIO_D0: D6.98 R41.1 XS3.7 | length 1281
  Top Layer, Top w7.87: XS3.7@2854.33,2078.74 2968.5,2078.74 3011.81,2035.43 3110.24,2035.43 ; R41.1@3110.24,1996.06 3110.24,2035.43 ; v1(3440.94,2094.49) 3429.13,2106.3 3322.83,2106.3 3251.97,2035.43 3110.24,2035.43 ; v1(3783.46,2078.74) 3818.9,2114.17 D6.98@3818.9,2299.21
  Mid-Layer 2, GND w7.87: v1(3440.94,2094.49) 3460.63,2074.8 3637.8,2074.8 3653.54,2090.55 3771.65,2090.55 v1(3783.46,2078.74) 3779.53,2074.8
SDIO_D1: D6.99 R42.1 XS3.8 | length 1269.4
  Top Layer, Top w7.87: XS3.8@2854.33,2035.43 2964.57,2035.43 3043.31,1956.69 3110.24,1956.69 ; R42.1@3110.24,1917.32 3110.24,1956.69 ; v1(3389.76,2059.06) 3350.39,2059.06 3248.03,1956.69 3110.24,1956.69 ; v1(3748.03,2059.06) 3748.03,2082.68 3799.21,2133.86 D6.99@3799.21,2299.21
  Mid-Layer 2, GND w7.87: v1(3389.76,2059.06) v1(3748.03,2059.06)
SDIO_D2: D6.111 R43.1 XS3.1 | length 953.1
  Top Layer, Top w7.87: XS3.1@2854.33,2338.58 2968.5,2338.58 3074.8,2444.88 3110.24,2444.88 ; R43.1@3110.24,2484.25 3110.24,2444.88 ; D6.111@3547.24,2185.04 3503.94,2185.04 3468.5,2220.47 3468.5,2295.28 3437.01,2326.77 3318.9,2326.77 3275.59,2370.08 3275.59,2413.39 3244.09,2444.88 3110.24,2444.88
SDIO_D3: D6.112 R44.1 XS3.2 | length 888.6
  Top Layer, Top w7.87: XS3.2@2854.33,2295.28 2960.63,2295.28 3031.5,2366.14 3110.24,2366.14 ; R44.1@3110.24,2405.51 3110.24,2366.14 ; D6.112@3547.24,2165.35 3500,2165.35 3452.76,2212.6 3452.76,2287.4 3429.13,2311.02 3311.02,2311.02 3255.91,2366.14 3110.24,2366.14
SPI1_CS: D6.110 XP3.3 | length 3162.5
  Top Layer, Top w7.87: v1(2830.71,2452.76) 2425.2,2047.24 2425.2,976.38 2460.63,940.94 2803.15,940.94 2838.58,976.38 2838.58,1085.04 XP3.3@2887.4,1133.86 ; v1(3275.59,2452.76) 3275.59,2437.01 3291.34,2421.26 3291.34,2377.95 3326.77,2342.52 3444.88,2342.52 3484.25,2303.15 3484.25,2228.35 3507.87,2204.72 D6.110@3547.24,2204.72
  Bottom Layer, Bottom w7.87: v1(2830.71,2452.76) v1(3275.59,2452.76)
SPI1_MISO: D6.134 XP3.4 | length 1241.6
  Top Layer, Top w7.87: v1(3098.43,1271.65) 3417.32,1271.65 3456.69,1311.02 3456.69,1688.98 3500,1732.28 D6.134@3547.24,1732.28
  Bottom Layer, Bottom w7.87: XP3.4@2887.4,1033.86 2937.01,1083.46 2937.01,1204.72 2976.38,1244.09 3070.87,1244.09 v1(3098.43,1271.65)
SPI1_MOSI: D6.135 XP3.1 | length 1243.8
  Top Layer, Top w7.87: v1(3055.12,1271.65) 3082.68,1244.09 3413.39,1244.09 3472.44,1303.15 3472.44,1681.1 3503.94,1712.6 D6.135@3547.24,1712.6
  Bottom Layer, Bottom w7.87: XP3.1@2787.4,1133.86 2850.39,1196.85 2905.51,1196.85 2980.32,1271.65 v1(3055.12,1271.65)
SPI1_SCK: D6.133 XP3.2 | length 1430.4
  Top Layer, Top w7.87: XP3.2@2787.4,1033.86 2736.22,1085.04 2736.22,1169.29 2748.03,1181.1 2925.2,1181.1 3043.31,1299.21 3421.26,1299.21 3440.94,1318.9 3440.94,1696.85 3496.06,1751.97 D6.133@3547.24,1751.97
SPI2_CS: D6.73 XP2.4 | length 1572.7
  Top Layer, Top w7.87: D6.73@4311.02,2299.21 4311.02,2267.72 4326.77,2251.97 v1(4338.58,2251.97)
  Bottom Layer, Bottom w7.87: v1(4338.58,2251.97) 4358.27,2251.97 4590.55,2019.68 4590.55,1346.46 4688.98,1248.03 4688.98,1106.3 4712.6,1082.68 4814.96,1082.68 XP2.4@4863.78,1033.86
SPI2_MISO: D6.28 XP2.1 | length 840.1
  Top Layer, Top w7.87: D6.28@4153.54,1460.63 4153.54,1374.02 4240.16,1287.4 4685.04,1287.4 4763.78,1208.66 XP2.1@4763.78,1133.86
SPI2_MOSI: D6.29 XP2.3 | length 874
  Top Layer, Top w7.87: D6.29@4173.23,1460.63 4173.23,1377.95 4248.03,1303.15 4692.91,1303.15 4858.27,1137.8 XP2.3@4863.78,1133.86
SPI2_SCK: D6.74 XP2.2 | length 1523
  Top Layer, Top w7.87: D6.74@4291.34,2299.21 4291.34,2248.03 v1(4295.28,2240.16)
  Bottom Layer, Bottom w7.87: v1(4295.28,2240.16) 4314.96,2224.41 4362.2,2224.41 4574.8,2011.81 4574.8,1338.58 4673.23,1240.16 4673.23,1066.93 4706.3,1033.86 XP2.2@4763.78,1033.86
SWDCK: D6.109 X2.1 | length 541.6
  Top Layer, Top w7.87: D6.109@3547.24,2224.41 3511.81,2224.41 3500,2236.22 3500,2425.2 3511.81,2437.01 3723.23,2437.01 X2.1@3774.41,2488.19
SWDIO: D6.105 X3.1 | length 262.7
  Top Layer, Top w7.87: D6.105@3681.1,2299.21 3681.1,2370.08 3763.78,2452.76 3787.4,2452.76 3818.9,2484.25 X3.1@3824.41,2488.19
TD+: D11.29 R38.1 XS2.2 | length 331.6
  Top Layer, Top w7.87: XS2.2@5760.24,1892.13 5760.24,1890.16 5759.84,1889.76 5842.52,1807.09 R38.1@5846.46,1807.09
  Bottom Layer, Bottom w7.87: XS2.2@5760.24,1892.13 5809.84,1842.52 5854.33,1842.52 5899.61,1797.24 D11.29@5899.61,1767.72
TD-: D11.28 R37.1 XS2.1 | length 556.3
  Top Layer, Top w7.87: XS2.1@5710.24,1992.13 5710.24,1989.76 5708.66,1988.19 5708.66,1838.58 5740.16,1807.09 R37.1@5744.09,1807.09
  Bottom Layer, Bottom w7.87: XS2.1@5710.24,1992.13 5710.24,1985.83 5708.66,1984.25 5708.66,1866.14 5748.03,1826.77 5846.46,1826.77 5879.92,1793.31 D11.28@5879.92,1767.72
UART3_RTS: D6.75 XP3.13 | length 1893.6
  Top Layer, Top w7.87: XP3.13@3387.4,1133.86 3421.26,1133.86 3551.18,1263.78 3551.18,1440.94 3763.78,1653.54 4208.66,1653.54 4248.03,1692.91 4248.03,1759.84 4149.61,1858.27 4149.61,1976.38 4263.78,2090.55 4263.78,2251.97 4271.65,2259.84 D6.75@4271.65,2299.21
UART3_RX: D6.78 XP3.9 | length 2057.8
  Top Layer, Top w7.87: XP3.9@3187.4,1133.86 3250.39,1196.85 3437.01,1196.85 3519.68,1279.53 3519.68,1456.69 3582.68,1519.68 3748.03,1685.04 4192.91,1685.04 4216.54,1708.66 4216.54,1744.09 4118.11,1842.52 4118.11,1992.13 4232.28,2106.3 4232.28,2244.09 4212.6,2263.78 D6.78@4212.6,2299.21
UART3_TX: D6.77 XP3.11 | length 1976.5
  Top Layer, Top w7.87: XP3.11@3287.4,1133.86 3334.65,1181.1 3444.88,1181.1 3535.43,1271.65 3535.43,1448.82 3755.91,1669.29 4200.79,1669.29 4232.28,1700.79 4232.28,1751.97 4133.86,1850.39 4133.86,1984.25 4248.03,2098.43 4248.03,2251.97 4232.28,2267.72 D6.77@4232.28,2299.21
UART6_CTS: D6.132 XP2.6 | length 1912.6
  Top Layer, Top w7.87: D6.132@3547.24,1771.65 3905.51,1771.65 v1(3960.63,1716.54) ; v1(4259.84,1330.71) 4271.65,1318.9 4759.84,1318.9 4913.39,1165.35 4913.39,1084.25 XP2.6@4963.78,1033.86
  Bottom Layer, Bottom w7.87: v1(3960.63,1716.54) 3960.63,1618.11 4043.31,1535.43 4043.31,1389.76 4102.36,1330.71 v1(4259.84,1330.71)
UART6_RTS: D6.127 XP2.5 | length 1913.9
  Top Layer, Top w7.87: D6.127@3547.24,1870.08 3893.7,1870.08 v1(3976.38,1787.4) ; v1(4299.21,1346.46) 4311.02,1334.65 4767.72,1334.65 4963.78,1138.58 XP2.5@4963.78,1133.86
  Bottom Layer, Bottom w7.87: v1(3976.38,1787.4) 3992.13,1771.65 3992.13,1610.24 4059.06,1543.31 4059.06,1397.64 4110.24,1346.46 4236.22,1346.46 4248.03,1358.27 4287.4,1358.27 v1(4299.21,1346.46)
UART6_RX: D6.97 XP2.8 | length 2230
  Top Layer, Top w7.87: D6.97@3838.58,2299.21 3838.58,1929.13 3862.2,1905.51 3921.26,1905.51 3992.13,1834.65 v1(4007.87,1834.65) ; v1(4338.58,1362.2) 4350.39,1350.39 4818.9,1350.39 4929.13,1240.16 5011.81,1157.48 5011.81,1085.83 XP2.8@5063.78,1033.86
  Bottom Layer, Bottom w7.87: v1(4007.87,1834.65) 4007.87,1618.11 4074.8,1551.18 4074.8,1405.51 4118.11,1362.2 4228.35,1362.2 4240.16,1374.02 4326.77,1374.02 v1(4338.58,1362.2)
UART6_TX: D6.96 XP2.7 | length 2146.9
  Top Layer, Top w7.87: D6.96@3858.27,2299.21 3858.27,1933.07 3870.08,1921.26 3929.13,1921.26 3988.19,1862.2 4019.68,1862.2 4039.37,1842.52 v1(4039.37,1803.15) ; v1(4377.95,1377.95) 4389.76,1366.14 4830.71,1366.14 4940.94,1255.91 4941.73,1255.91 XP2.7@5063.78,1133.86
  Bottom Layer, Bottom w7.87: v1(4039.37,1803.15) 4023.62,1787.4 4023.62,1625.98 4090.55,1559.06 4090.55,1413.39 4125.98,1377.95 4220.47,1377.95 4232.28,1389.76 4366.14,1389.76 v1(4377.95,1377.95)
USB_DM: D6.103 R33.2 | length 871.7
  Top Layer, Top w7.87: D6.103@3720.47,2299.21 3720.47,2362.2 3779.53,2421.26 3803.15,2421.26 3818.9,2437.01 4456.69,2437.01 4480.31,2413.39 R33.2@4482.28,2405.51
USB_DP: D6.104 R34.2 | length 896.5
  Top Layer, Top w7.87: D6.104@3700.79,2299.21 3700.79,2366.14 3771.65,2437.01 3795.28,2437.01 3811.02,2452.76 4456.69,2452.76 4480.31,2476.38 R34.2@4482.28,2480.32
USB_VBUS: C39.2 D6.101 D12.5 XS1.1 | length 2438.2
  Top Layer, Top w7.87: D6.101@3759.84,2299.21 3759.84,2377.95 3787.4,2405.51 3811.02,2405.51 3826.77,2421.26 4413.39,2421.26 v1(4425.2,2409.45)
  Top Layer, Top w11.81: C39.2@5253.94,2401.57 5257.87,2397.64 5259.84,2397.64 5314.96,2342.52 5314.96,2279.53 ; D12.5@5259.84,2279.53 5314.96,2279.53 ; XS1.1@5263.78,2058.27 5314.96,2109.45 5314.96,2279.53
  Bottom Layer, Bottom w7.87: v1(4425.2,2409.45) 4523.62,2507.87 5086.61,2507.87 5212.6,2381.89 5212.6,2118.11 5263.78,2066.93 XS1.1@5263.78,2058.27
VBAT: C5.1 D6.18 R11.1 | length 3111.8
  Top Layer, Top w7.87: D6.18@3956.69,1460.63 3956.69,1381.89 4003.94,1334.65 4003.94,988.19 4074.8,917.32 4200.79,917.32 4299.21,1015.75 4629.92,1015.75 4728.35,917.32 5389.76,917.32 v1(5413.39,940.94)
  Bottom Layer, Bottom w7.87: v1(5413.39,940.94) 5578.74,940.94 5614.17,976.38 5614.17,1153.54 5696.85,1236.22 5696.85,1330.71 5720.47,1354.33 5881.89,1354.33 5901.57,1334.65 5901.57,1232.28 5956.69,1177.17 C5.1@5956.69,1173.23 R11.1@5956.69,1094.49
WDET0: D6.20 XP2.16 | length 2073.6
  Top Layer, Top w7.87: D6.20@3996.06,1460.63 3996.06,1389.76 4035.43,1350.39 4035.43,1003.94 4090.55,948.82 4185.04,948.82 4307.09,1070.87 4598.43,1070.87 4736.22,933.07 5362.99,933.07 XP2.16@5463.78,1033.86
WDET1: D6.21 XP2.15 | length 2124.2
  Top Layer, Top w7.87: D6.21@4015.75,1460.63 4015.75,1393.7 4051.18,1358.27 4051.18,1011.81 4098.43,964.57 4177.17,964.57 4299.21,1086.61 4606.3,1086.61 4744.09,948.82 5354.33,948.82 5413.39,1007.87 5413.39,1083.46 XP2.15@5463.78,1133.86
~INT: D6.5 XP3.7 | length 1316.2
  Top Layer, Top w7.87: XP3.7@3087.4,1133.86 3137.8,1083.46 3137.8,976.38 3173.23,940.94 3708.66,940.94 3744.09,976.38 3744.09,1267.72 3700.79,1311.02 D6.5@3700.79,1460.63
~OE: D6.118 D7.41 D8.41 D9.8 R17.2 | length 3593.8
  Top Layer, Top w7.87: v1(2500,1704.72) 2440.94,1763.78 2440.94,1996.06 v1(2700.79,2255.91) ; R17.2@2572.83,1137.8 2572.83,1139.76 2629.92,1196.85 2917.32,1196.85 3035.43,1314.96 D7.41@3035.43,1342.52 3035.43,1374.02 2976.38,1433.07 2976.38,1696.85 v1(2984.25,1704.72) ; v1(3322.83,1897.64) 3370.08,1897.64 3472.44,2003.94 3472.44,2031.5 3488.19,2047.24 D6.118@3547.24,2047.24
  Bottom Layer, Bottom w7.87: v1(2500,1704.72) 2527.56,1677.17 2956.69,1677.17 v1(2984.25,1704.72) 3035.43,1755.91 D8.41@3035.43,1799.21 3035.43,1830.71 3051.18,1846.46 3220.47,1846.46 3279.53,1905.51 3314.96,1905.51 v1(3322.83,1897.64) ; v1(2700.79,2255.91) 2803.15,2358.27 D9.8@3334.65,2358.27
~RESET: C8.2 D6.25 R13.2 X1.1 | length 2033.1
  Top Layer, Top w7.87: R13.2@3375.98,2401.57 3446.85,2401.57 C8.2@3448.82,2399.61 3450.79,2401.57 3452.76,2401.57 3503.94,2452.76 3688.98,2452.76 X1.1@3724.41,2488.19 ; D6.25@4094.49,1460.63 v1(4094.49,1598.43)
  Bottom Layer, Bottom w7.87: X1.1@3724.41,2488.19 3775.59,2437.01 4125.98,2437.01 4232.28,2330.71 4232.28,1980.32 4279.53,1933.07 4279.53,1822.83 4248.03,1791.34 4114.17,1791.34 4059.06,1736.22 4059.06,1633.86 v1(4094.49,1598.43)
~WAIT: D6.122 D9.7 R20.2 | length 754.1
  Top Layer, Top w7.87: D6.122@3547.24,1968.5 3622.05,1968.5 3665.35,2011.81 v1(3665.35,2244.09)
  Bottom Layer, Bottom w7.87: D9.7@3334.65,2377.95 3464.57,2377.95 3503.94,2338.58 R20.2@3507.87,2336.61 3545.28,2336.61 3637.8,2244.09 v1(3665.35,2244.09)
~WE: D6.119 D7.17 D8.17 D9.18 R18.2 | length 2143.3
  Top Layer, Top w7.87: v1(2562.99,1897.64) 2598.43,1889.76 2625.98,1862.2 D7.17@2625.98,1799.21 2625.98,1539.37 2649.61,1515.75 2649.61,1484.25 v1(2622.05,1456.69) ; D6.119@3547.24,2027.56 3622.05,2027.56 3637.8,2043.31 v1(3637.8,2118.11)
  Bottom Layer, Bottom w7.87: v1(2562.99,1897.64) 2696.85,2031.5 2917.32,2031.5 3043.31,2157.48 3295.28,2157.48 3299.21,2161.42 D9.18@3334.65,2161.42 3594.49,2161.42 v1(3637.8,2118.11) ; R18.2@2572.83,1212.6 2574.8,1216.54 2625.98,1267.72 D8.17@2625.98,1342.52 2625.98,1452.76 v1(2622.05,1456.69)
pads on no net: D5.4 D6.1 D6.3 D6.4 D6.7 D6.34 D6.37 D6.40 D6.47 D6.48 D6.49 D6.76 D6.79 D6.93 D6.100 D6.102 D6.117 D6.136 D6.137 D6.141 D6.142 D7.7 D7.8 D7.15 D7.16 D7.29 D7.30 D7.37 D7.38 D8.7 D8.8 D8.15 D8.16 D8.29 D8.30 D8.37 D8.38 D9.1 D9.2 D9.3 D9.4 D9.5 D9.6 D9.10 D9.11 D9.14 D9.15 D9.20 D9.21 D9.22 D9.23 D9.24 D9.26 D9.27 D9.28 D9.33 D9.35 D9.38 D9.40 D9.45 D9.46 D9.47 D11.4 D11.14 D11.20 D11.26 D12.4 D12.6 VT1.1 VT1.5 VT1.6 X4.1 XP3.8 XP3.10 XP3.12 XP3.17 XP3.18 XP3.19 XP3.20 XS1.5 XS1.6 XS2.4 XS2.5 XS2.13 XS2.14

## Polygon pours and split planes (outlines as drawn)
GND on Top Layer, Top (solid, pour order 8): 6236.22,1881.89 6133.86,1881.89 6133.86,1460.63 5909.45,1460.63 5834.65,1535.43 5799.21,1535.43 5799.21,1350.39 6031.5,1350.39 6051.18,1330.71 6236.22,1330.71
+5V on Top Layer, Top (solid, pour order 6): 5661.42,913.39 5850.39,913.39 5850.39,1086.61 5661.42,1086.61
NET00001 on Top Layer, Top (solid, pour order 4): 5744.09,1118.11 5854.33,1118.11 5854.33,1397.64 5744.09,1397.64
NET00002 on Top Layer, Top (solid, pour order 2): 6200.79,1173.23 6200.79,1251.97 6059.06,1251.97 6059.06,1173.23
+3,3V on Top Layer, Top (solid, pour order 0): 5606.3,1314.96 5606.3,1413.39 5559.06,1413.39 5559.06,1314.96
GND on Bottom Layer, Bottom (solid, pour order 14): 4944.88,1374.02 4944.88,1208.66 5429.13,1208.66 5429.13,1374.02
GND on Bottom Layer, Bottom (solid, pour order 12): 6129.92,909.45 6228.35,909.45 6228.35,1358.27 6129.92,1358.27
+3,3V on Bottom Layer, Bottom (solid, pour order 10): 5511.81,1208.66 5578.74,1208.66 5610.24,1240.16 5610.24,1425.2 5511.81,1425.2
GND on Mid-Layer 2, GND (solid, remove dead copper, pour order 16): 2429.13,2503.94 2429.13,905.51 6232.28,905.51 6232.28,2503.94
+3,3V on Mid-Layer 1, +3.3V (solid, remove dead copper, pour order 18): 2429.13,2503.94 2429.13,905.51 6232.28,905.51 6232.28,1803.15 4685.04,1803.15 4685.04,2503.94

## Keep-outs
Keep-Out Layer, Board:
  lines w7.87: 2401.57,877.95 6259.84,877.95 6259.84,2531.5 2401.57,2531.5 2401.57,877.95

## Other copper
Top Layer, Top:
  text "IOT_CPU-V0" at 4732.99,1877.95 h62.5
  text "INSYTE" at 4733.32,1437.01 h62.5
Mid-Layer 1, +3.3V:
  pour cut-out: 4704.72,1192.91 4704.72,972.44 5724.41,972.44 5724.41,1192.91
  pour cut-out: 3688.98,2531.5 3688.98,2444.88 4019.68,2444.88 4019.68,2531.5
  pour cut-out: 4267.72,984.25 4267.72,881.89 4665.35,881.89 4665.35,984.25
  pour cut-out: 4318.9,1279.53 4318.9,1177.17 4665.35,1177.17 4665.35,1279.53
  pour cut-out: 2728.35,1192.91 2728.35,972.44 3748.03,972.44 3748.03,1192.91
  pour cut-out: 6074.8,1196.85 6185.04,1196.85 6185.04,1385.83 6074.8,1385.83
Mid-Layer 2, GND:
  pour cut-out: 4704.72,1192.91 4704.72,972.44 5724.41,972.44 5724.41,1192.91
  pour cut-out: 3688.98,2531.5 3688.98,2452.76 4011.81,2452.76 4011.81,2531.5
  pour cut-out: 4838.58,2409.45 4685.04,2409.45 4685.04,2098.43 4838.58,2098.43
  pour cut-out: 2728.35,1192.91 2728.35,972.44 3748.03,972.44 3748.03,1192.91
  pour cut-out: 6074.8,1196.85 6185.04,1196.85 6185.04,1330.71 6074.8,1330.71
  pour cut-out: 5259.84,2133.86 5259.84,2188.98 5110.24,2188.98 5110.24,2003.94 5318.9,2003.94 5318.9,2133.86

## Silkscreen, mask and mechanical layers (free items; w line width, h text height)
Mechanical 1, Top Assy:
  lines w7.87: 5181.1,2314.96 5204.72,2314.96 5204.72,2338.58 ; 5181.1,2318.9 5200.79,2318.9 5200.79,2338.58 ; 5181.1,2322.83 5196.85,2322.83 5196.85,2334.65 ; 5181.1,2326.77 5192.91,2326.77 5192.91,2338.58 ; 5181.1,2330.71 5188.98,2330.71 5188.98,2338.58